# Altium PCB LVDS2RGB.PcbDoc
Units mm, origin at the board's own origin, x right, y up, seen from the top; angles counter-clockwise.
Board outline 34.16 x 35.56 mm, 2 copper layers (Top Layer, Bottom Layer); 11 components, 53 nets, 122 pads, 9 vias.
Unrouted connection lines stored in the file: 2.
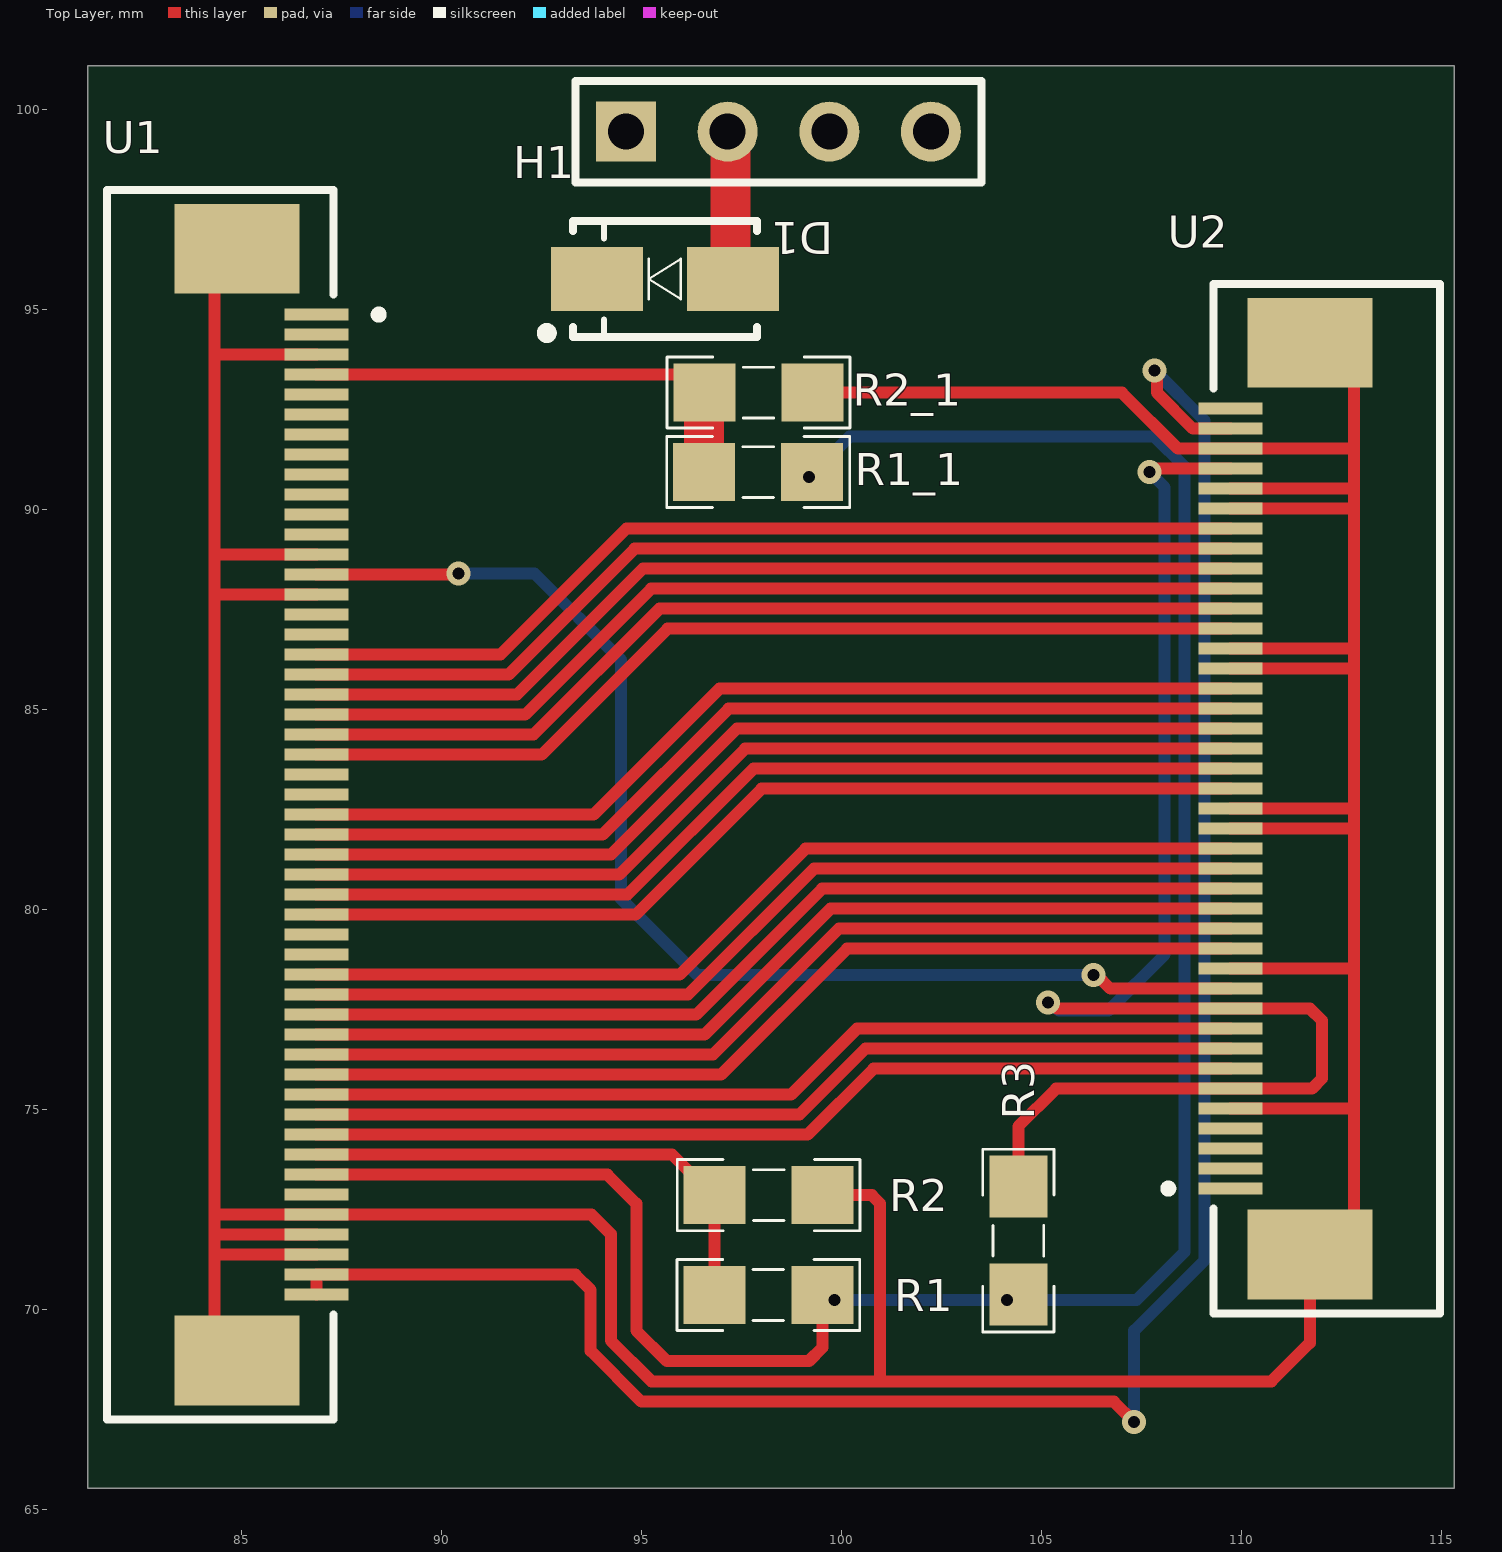
[diagram p0: Top Layer view]
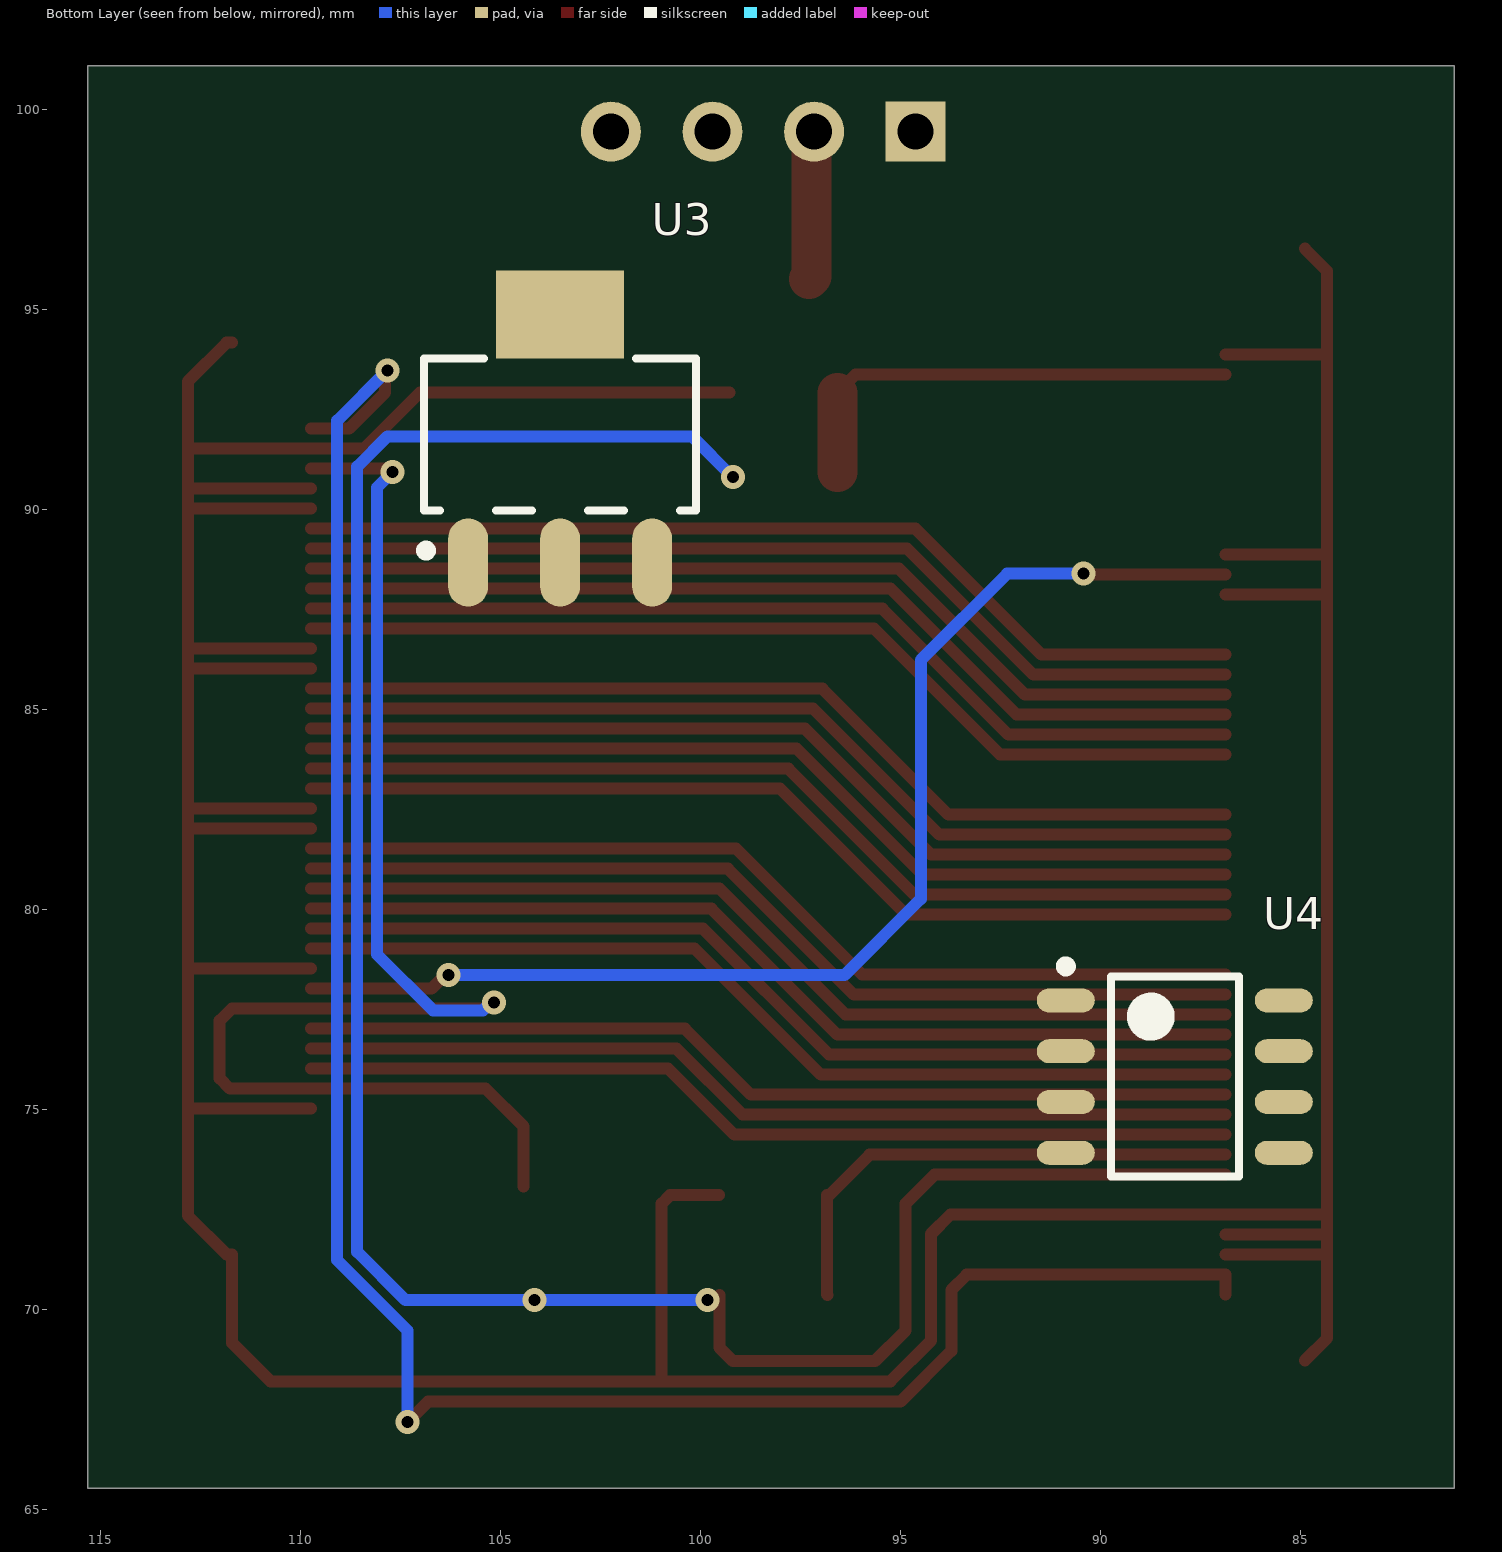
[diagram p1: Bottom Layer view, seen from below]
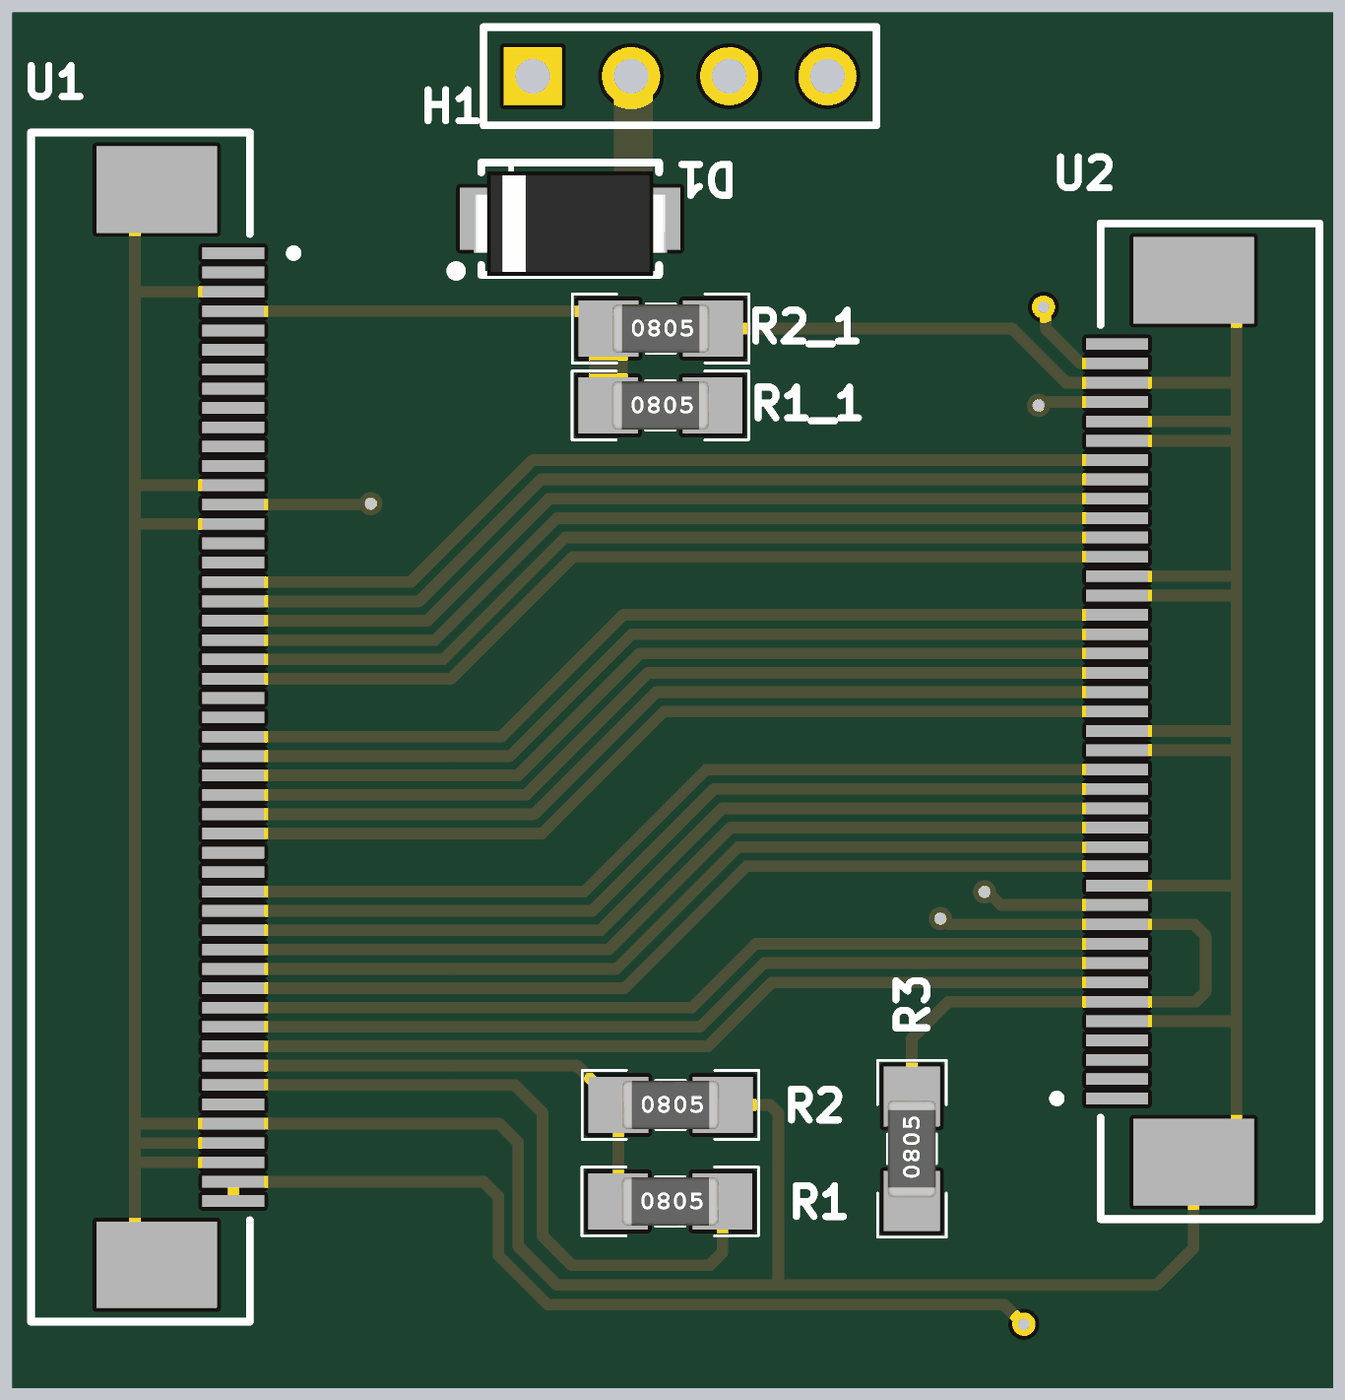
[diagram p2: 3D render of the assembled board from above, using the file's embedded part models]

## Layer stack, top to bottom
Top Solder: solder mask 0.0102, Solder Resist, Dk 3.5
Top Layer: signal copper 0.0356
Dielectric 1: dielectric 0.32, FR-4, Dk 4.8
Bottom Layer: signal copper 0.0356
Bottom Solder: solder mask 0.0102, Solder Resist, Dk 3.5

## Board outline
81.153,65.532 81.153,101.092 115.316,101.092 115.316,65.532

## Design rules (kind name [scope] priority, off if disabled: settings)
Clearance [All] p1: gap=0.2 ignorepadtopadclearanceinfootprint=FALSE
PolygonConnect [All] p1: connectstyle=Relief reliefconductorwidth=0.254 reliefentries=4 polygonreliefangle="90 Angle" airgapwidth=0.254
RoutingVias [All] p1: holewidth=0.6 width=0.3 viastyle="Through Hole" minholewidth=0.1 minwidth=0.1 maxholewidth=10 maxwidth=10
SolderMaskExpansion [All] p1: expansion=0.102 istentingtop=FALSE
Width [All] p1: maxlimit=10 minlimit=0.1 preferedwidth=0.3
30 further rules are at their usual default settings.

## Components (designator, comment, footprint, x,y, rotation, side; value= is the part's Value field where it differs from the comment)
D1 "Comment" DIOM4629X24N 95.582,95.758 r180 top
H1 "Comment" HDR1X4 94.615,99.441 r0 top
R1 "Comment" RESC3413X04N 98.171,70.358 r0 top
R1_1 "Comment" RESC3413X04N 97.917,90.932 r0 top
R2 "Comment" RESC3413X04N 98.179,72.853 r0 top
R2_1 "Comment" RESC3413X04N 97.925,92.919 r0 top
R3 "Comment" RESC3413X04N 104.419,71.718 r90 top
U1 "Comment" SAMTEC_ZF5S-50-01-T-WT 84.888,82.618 r270 top locked
U2 "Comment" SAMTEC_ZF5S-40-02-T-WT 111.708,82.769 r90 top locked
U3 "Comment" SOT223 103.505,91.869 r90 bottom
U4 "Comment" SOIC127P600X175-8N 88.138,75.819 r180 bottom

## Footprints (in the part's own frame and the unit in brackets; to place one, negate y for a bottom-side part, rotate by r counter-clockwise, add the part's x,y. Pads: shape width x height; smd on the part's side, far side on the other; paste and mask are expansions set on the pad)
DIOM4629X24N [mm] "Molded Diode, 2-Leads, Body 4/60x2/90mm, IPC Medium Density-Design:Abbas Basereh"
  rect 2.3x1.6 smd: 1(-1.7,0) 2(1.7,0)
  silkscreen extent -2.3,-1.45 3.07,1.47, body extent -2.5,-1.22 2.5,1.48, height 2.2
HDR1X4 [mm] "Connector; Header; 4 Position"
  rect 1.5x1.5 hole 0.9: 1(0,0)
  round 1.5 hole 0.9: 2(2.54,0) 3(5.08,0) 4(7.62,0)
  silkscreen extent -1.27,-1.27 8.89,1.27
RESC3413X04N [mm] "Chip Resistor, 2-Leads, Body 3/40x1/30mm, IPC Medium Density-Design:Abbas Basereh"
  rect 1.55x1.45 smd: 1(-1.35,0) 2(1.35,0)
  silkscreen extent -2.29,-0.89 2.29,0.89, body extent -1.25,-0.62 1.25,0.62, height 0.79
SAMTEC_ZF5S-40-02-T-WT [mm]
  rect 0.3x1.6 smd: 01(-9.75,1.98) 02(-9.25,1.98) 03(-8.75,1.98) 04(-8.25,1.98) 05(-7.75,1.98) 06(-7.25,1.98) 07(-6.75,1.98) 08(-6.25,1.98) 09(-5.75,1.98) 10(-5.25,1.98) 11(-4.75,1.98) 12(-4.25,1.98) 13(-3.75,1.98) 14(-3.25,1.98) 15(-2.75,1.98) 16(-2.25,1.98) 17(-1.75,1.98) 18(-1.25,1.98) 19(-0.75,1.98) 20(-0.25,1.98) 21(0.25,1.98) 22(0.75,1.98) 23(1.25,1.98) 24(1.75,1.98) 25(2.25,1.98) 26(2.75,1.98) 27(3.25,1.98) 28(3.75,1.98) 29(4.25,1.98) 30(4.75,1.98) 31(5.25,1.98) 32(5.75,1.98) 33(6.25,1.98) 34(6.75,1.98) 35(7.25,1.98) 36(7.75,1.98) 37(8.25,1.98) 38(8.75,1.98) 39(9.25,1.98) 40(9.75,1.98)
  rect 2.24x3.12 smd: S1(-11.397,0) S2(11.397,0)
  silkscreen extent -12.87,-3.25 12.87,3.64
SAMTEC_ZF5S-50-01-T-WT [mm]
  rect 0.3x1.6 smd: 01(-12.25,1.98) 02(-11.75,1.98) 03(-11.25,1.98) 04(-10.75,1.98) 05(-10.25,1.98) 06(-9.75,1.98) 07(-9.25,1.98) 08(-8.75,1.98) 09(-8.25,1.98) 10(-7.75,1.98) 11(-7.25,1.98) 12(-6.75,1.98) 13(-6.25,1.98) 14(-5.75,1.98) 15(-5.25,1.98) 16(-4.75,1.98) 17(-4.25,1.98) 18(-3.75,1.98) 19(-3.25,1.98) 20(-2.75,1.98) 21(-2.25,1.98) 22(-1.75,1.98) 23(-1.25,1.98) 24(-0.75,1.98) 25(-0.25,1.98) 26(0.25,1.98) 27(0.75,1.98) 28(1.25,1.98) 29(1.75,1.98) 30(2.25,1.98) 31(2.75,1.98) 32(3.25,1.98) 33(3.75,1.98) 34(4.25,1.98) 35(4.75,1.98) 36(5.25,1.98) 37(5.75,1.98) 38(6.25,1.98) 39(6.75,1.98) 40(7.25,1.98) 41(7.75,1.98) 42(8.25,1.98) 43(8.75,1.98) 44(9.25,1.98) 45(9.75,1.98) 46(10.25,1.98) 47(10.75,1.98) 48(11.25,1.98) 49(11.75,1.98) 50(12.25,1.98)
  rect 2.24x3.12 smd: S1(-13.897,0) S2(13.897,0)
  silkscreen extent -15.37,-3.25 15.37,3.64
SOIC127P600X175-8N [mm] "SOIC, 8-Leads, Body 4.91x3.90mm, Pitch 1.27mm, IPC Medium Density"
  oval 1.45x0.6 smd: 1(-2.725,1.905) 2(-2.725,0.635) 3(-2.725,-0.635) 4(-2.725,-1.905) 5(2.725,-1.905) 6(2.725,-0.635) 7(2.725,0.635) 8(2.725,1.905)
  silkscreen extent -2.85,-2.5 1.6,2.88, body extent -2,-2.5 2,2.5, height 1.76
SOT223 [mm] "SOT223, 4-Leads, Body 6.5x3.5mm, Pitch 2.30mm-Designer Abbas Basereh"
  oval 2.2x1 smd: 1(-3.2,2.3) 2(-3.2,0) 3(-3.2,-2.3)
  rect 2.2x3.2 smd: 4(3,0)
  Top Layer pour cut-out: -1.7,3.556 1.7,3.556 1.7,-3.556 -1.7,-3.556
  silkscreen extent -3.02,-3.4 1.9,3.48, body extent -3.5,-3.25 3.5,3.25, height 1.7

## Via types
v1: diameter 0.6, hole 0.3, Top Layer to Bottom Layer, 9 vias

## Nets (pads, with @x,y where several pads share a name; then routed paths per layer and width w, separated by ;. In a path a pad name is that pad's centre, name@x,y a point inside that pad or via, vN(x,y) a via of type N, cw(c..) or ccw(c..) an arc to the next point about the centre after c; other vN are vias at no path point)
3V3: R1.2 R1_1.2 R3.1 U1.44 | length 56.9
  Top Layer w0.3: U1.44 94.145,73.368 94.869,72.644 94.869,69.469 95.631,68.707 99.187,68.707 99.521,69.041 R1.2
  Bottom Layer w0.3: v1(99.187,90.805) 100.203,91.821 107.823,91.821 108.577,91.067 108.577,71.438 107.37,70.231 v1(99.822,70.231)
  other v1: 104.14,70.231
9V: H1.4
12V: D1.2 H1.3
AVDD: U1.08
BLUE0: U1.39 U2.13 | length 24.2
  Top Layer w0.3: U1.39 96.988,75.868 100.139,79.019 U2.13
BLUE1: U1.38 U2.14 | length 24.2
  Top Layer w0.3: U1.38 96.781,76.368 99.932,79.519 U2.14
BLUE2: U1.37 U2.15 | length 24.2
  Top Layer w0.3: U1.37 96.573,76.868 99.724,80.019 U2.15
BLUE3: U1.36 U2.16 | length 24.2
  Top Layer w0.3: U1.36 96.366,77.368 99.517,80.519 U2.16
BLUE4: U1.35 U2.17 | length 24.2
  Top Layer w0.3: U1.35 96.159,77.868 99.31,81.019 U2.17
BLUE5: U1.34 U2.18 | length 24.2
  Top Layer w0.3: U1.34 95.952,78.368 99.103,81.519 U2.18
BLUE6: U1.33
BLUE7: U1.32
BLUE8: 
BLUE9: 
DCLK: U1.14 U2.11 | length 30.7
  Top Layer w0.3: U1.14 90.4,88.368 v1(90.424,88.392) ; v1(106.299,78.359) 106.38,78.359 106.72,78.019 U2.11
  Bottom Layer w0.3: v1(90.424,88.392) 92.329,88.392 94.488,86.233 94.488,80.264 96.393,78.359 v1(106.299,78.359)
DE: U1.42 U2.07 | length 23.5
  Top Layer w0.3: U1.42 99.15,74.368 100.801,76.019 U2.07
DITHB: R1_1.1 R2_1.1 U1.04 | length 11.9
  Top Layer w0.3: U1.04 96.126,93.368 R2_1.1 R2_1.1@96.567,92.912
  Top Layer w1: R1_1.1 R2_1.1@96.567,92.912
GND: H1.1 R2.2 R2_1.2 U1.03 U1.13 U1.15 U1.46 U1.47 U1.48 U1.S1 U1.S2 U2.05 U2.12 U2.19 U2.20 U2.27 U2.28 U2.35 U2.36 U2.38 U2.S1 U2.S2 | length 142.9
  Top Layer w0.3: U1.S2 84.328,69.281 84.328,71.368 ; U1.S1 84.328,95.955 84.328,93.853 ; U1.48 84.328,71.368 ; U1.47 84.342,71.868 84.328,71.882 ; U1.15 84.344,87.868 84.328,87.884 ; U1.13 84.36,88.868 84.328,88.9 ; U1.03 84.343,93.868 84.328,93.853 ; R2_1.2 107.01,92.919 108.41,91.519 U2.38 112.81,91.519 ; R2.2 100.756,72.853 100.965,72.644 100.965,68.199 ; U2.05 112.81,75.019 ; U2.12 112.81,78.519 ; U2.19 112.81,82.019 ; U2.20 112.81,82.519 ; U2.27 112.81,86.019 ; U2.28 112.81,86.519 ; U2.35 112.81,90.019 ; U2.36 112.81,90.519 ; U2.S2 111.84,94.166 112.81,93.196 112.81,91.519 ; 84.328,71.368 84.328,71.882 ; 84.328,71.882 84.328,72.368 ; 84.328,72.368 U1.46 93.748,72.368 94.234,71.882 94.234,69.215 95.25,68.199 100.965,68.199 ; 84.328,72.368 84.328,87.884 ; 84.328,87.884 84.328,88.9 ; 84.328,88.9 84.328,93.853 ; 100.965,68.199 110.744,68.199 111.708,69.163 U2.S1 111.84,71.372 112.81,72.342 112.81,75.019 ; 112.81,75.019 112.81,78.519 ; 112.81,78.519 112.81,82.019 ; 112.81,82.019 112.81,82.519 ; 112.81,82.519 112.81,86.019 ; 112.81,86.019 112.81,86.519 ; 112.81,86.519 112.81,90.019 ; 112.81,90.019 112.81,90.519 ; 112.81,90.519 112.81,91.519
GREEN0: U1.31 U2.21 | length 24.2
  Top Layer w0.3: U1.31 94.854,79.868 98.005,83.019 U2.21
GREEN1: U1.30 U2.22 | length 24.2
  Top Layer w0.3: U1.30 94.647,80.368 97.798,83.519 U2.22
GREEN2: U1.29 U2.23 | length 24.2
  Top Layer w0.3: U1.29 94.44,80.868 97.591,84.019 U2.23
GREEN3: U1.28 U2.24 | length 24.2
  Top Layer w0.3: U1.28 94.233,81.368 97.384,84.519 U2.24
GREEN4: U1.27 U2.25 | length 24.2
  Top Layer w0.3: U1.27 94.026,81.868 97.177,85.019 U2.25
GREEN5: U1.26 U2.26 | length 24.2
  Top Layer w0.3: U1.26 93.798,82.368 96.949,85.519 U2.26
GREEN6: U1.25
GREEN7: U1.24
GREEN8: 
HSYNC: U1.40 U2.09 | length 23.5
  Top Layer w0.3: U1.40 98.736,75.368 100.387,77.019 U2.09
LEDA: U1.49 U1.50 U2.39 | length 53.7
  Top Layer w0.3: U1.50 U1.49 93.343,70.868 93.726,70.485 93.726,68.961 94.996,67.691 106.807,67.691 v1(107.315,67.183) ; v1(107.823,93.472) 107.88,93.415 107.88,92.922 108.783,92.019 U2.39
  Bottom Layer w0.3: v1(107.315,67.183) 107.315,69.469 109.077,71.231 109.077,92.218 v1(107.823,93.472)
LR: U1.12
MODE: R1.1 R2.1 U1.43 | length 12.9
  Top Layer w0.3: U1.43 95.764,73.868 96.779,72.853 R2.1 96.829,70.366 R1.1
MOE: 
RED0: U1.23 U2.29 | length 24.2
  Top Layer w0.3: U1.23 92.504,83.868 95.655,87.019 U2.29
RED1: U1.22 U2.30 | length 24.2
  Top Layer w0.3: U1.22 92.297,84.368 95.448,87.519 U2.30
RED2: U1.21 U2.31 | length 24.2
  Top Layer w0.3: U1.21 92.09,84.868 95.241,88.019 U2.31
RED3: U1.20 U2.32 | length 24.2
  Top Layer w0.3: U1.20 91.883,85.368 95.034,88.519 U2.32
RED4: U1.19 U2.33 | length 24.2
  Top Layer w0.3: U1.19 91.676,85.868 94.827,89.019 U2.33
RED5: U1.18 U2.34 | length 24.2
  Top Layer w0.3: U1.18 91.468,86.368 94.619,89.519 U2.34
RED6: U1.17
RED7: U1.16
RED8: 
RESET: U1.07
UD: U1.11
VCC: R3.2 U2.06 U2.10 U2.37 | length 36
  Top Layer w0.3: R3.2 104.419,74.574 105.364,75.519 U2.06 111.76,75.519 112.014,75.773 112.014,77.216 111.711,77.519 U2.10 105.387,77.519 105.237,77.669 v1(105.156,77.669) ; v1(107.696,90.932) 107.777,90.932 107.864,91.019 U2.37
  Bottom Layer w0.3: v1(105.156,77.669) 105.237,77.669 105.436,77.47 106.68,77.47 108.077,78.867 108.077,90.551 v1(107.696,90.932)
VGH: U1.10
VGL: U1.09
VIN: D1.1 H1.2 | length 3.7
  Top Layer w1: H1.2 97.218,99.377 97.218,95.822 D1.1
VSYNC: U1.41 U2.08 | length 23.5
  Top Layer w0.3: U1.41 98.943,74.868 100.594,76.519 U2.08
X1: U2.04
X2: U2.02
X3: 
Y1: U2.03
Y2: U2.01
pads on no net: U1.01 U1.02 U1.05 U1.06 U1.45 U2.40 U3.1 U3.2 U3.3 U3.4 U4.1 U4.2 U4.3 U4.4 U4.5 U4.6 U4.7 U4.8

## Silkscreen, mask and mechanical layers (free items; w line width, h text height)
Mechanical 1:
  the board outline again, w0.3